# EAGLE board LEDSubMatrixHighDensity_template (EAGLE 9.6.2)
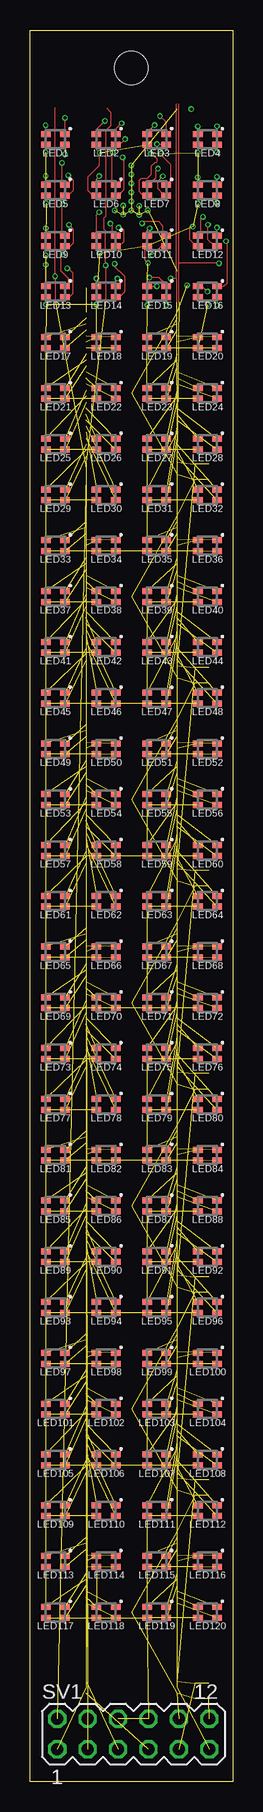
[diagram p0: board, top side]
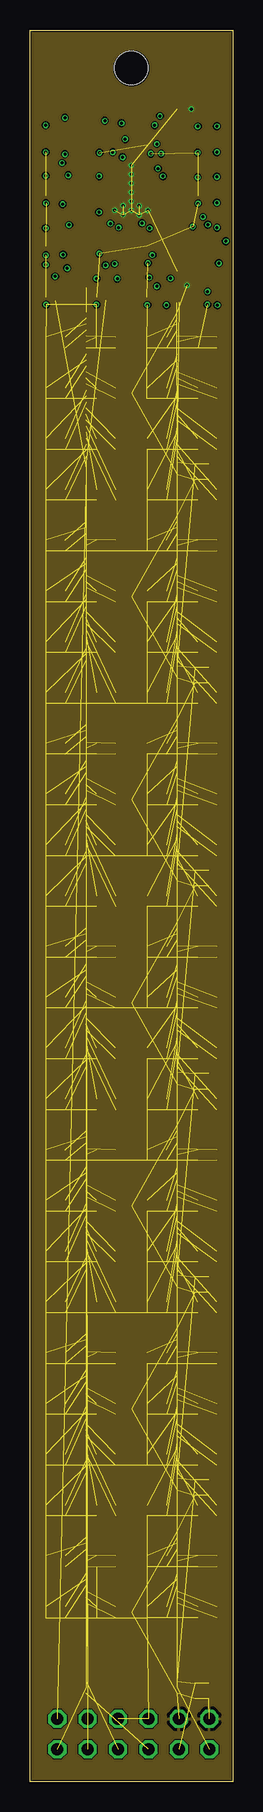
[diagram p1: board, inner layer InnerTop]
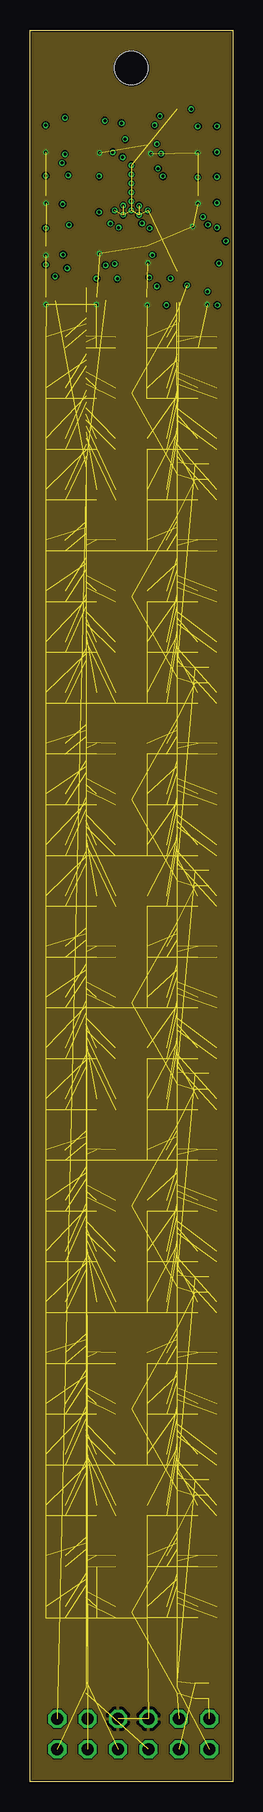
[diagram p2: board, inner layer InnerBottom]
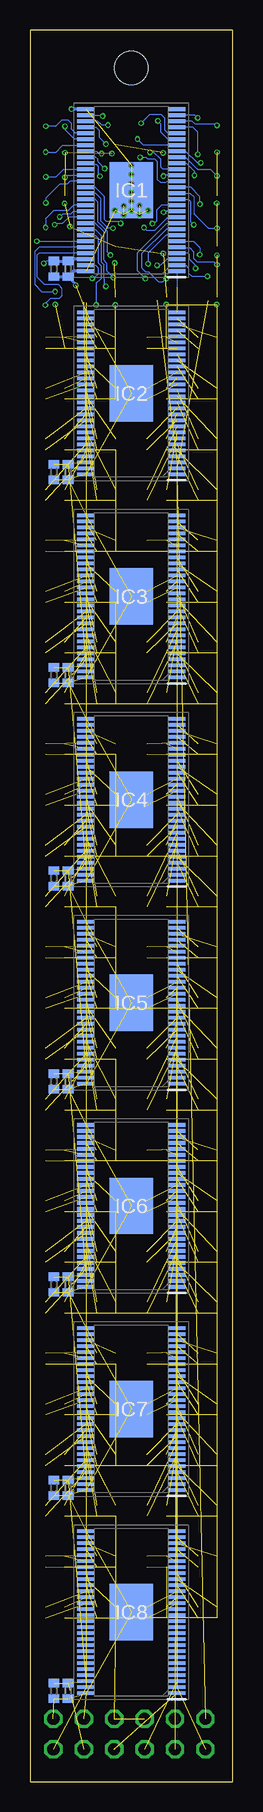
[diagram p3: board, bottom side, seen from below]

Size 16.93 x 146 mm. Coordinates in mm from the lower left corner, seen from the top.
Outline: 0,146 16.93,146 16.93,0 0,0 0,146
Copper layers (1+2*15+16): Top 0.035mm / dielectric 0.2mm / InnerTop 0.0175mm / dielectric 1.065mm / InnerBottom 0.0175mm / dielectric 0.2mm / Bottom 0.035mm
Design rules "jlcpcb_4layer_1oz *": minimum track width 4mil, minimum drill 0.2mm, track to track 4mil, track to pad 0.2mm, pad to pad 5mil, via to via 6mil, smd to smd 5mil, copper to edge 5mil, drill to drill 0.5mm, minimum pad ring 10mil, minimum via ring 0.1mm, stop-mask expansion 4mil, vias tented up to drill 0mil, thermal gap 10mil
Holes 2.75 mm at 8.47,142.82

## Footprints (pad centres in the part's own frame; a part is rotated, then mirrored left to right if it is on the bottom)
C0402 = smd 0.7 x 0.9: 1 -0.65,0; 2 0.65,0
SOP50P810X120-57N = smd 1.475 x 0.3: 1 -3.788,6.75; 2 -3.788,6.25; 3 -3.788,5.75; 4 -3.788,5.25; 5 -3.788,4.75; 6 -3.788,4.25; 7 -3.788,3.75; 8 -3.788,3.25; 9 -3.788,2.75; 10 -3.788,2.25; 11 -3.788,1.75; 12 -3.788,1.25; 13 -3.788,0.75; 14 -3.788,0.25; 15 -3.788,-0.25; 16 -3.788,-0.75; 17 -3.788,-1.25; 18 -3.788,-1.75; 19 -3.788,-2.25; 20 -3.788,-2.75; 21 -3.788,-3.25; 22 -3.788,-3.75; 23 -3.788,-4.25; 24 -3.788,-4.75; 25 -3.788,-5.25; 26 -3.788,-5.75; 27 -3.788,-6.25; 28 -3.788,-6.75; 29 3.788,-6.75; 30 3.788,-6.25; 31 3.788,-5.75; 32 3.788,-5.25; 33 3.788,-4.75; 34 3.788,-4.25; 35 3.788,-3.75; 36 3.788,-3.25; 37 3.788,-2.75; 38 3.788,-2.25; 39 3.788,-1.75; 40 3.788,-1.25; 41 3.788,-0.75; 42 3.788,-0.25; 43 3.788,0.25; 44 3.788,0.75; 45 3.788,1.25; 46 3.788,1.75; 47 3.788,2.25; 48 3.788,2.75; 49 3.788,3.25; 50 3.788,3.75; 51 3.788,4.25; 52 3.788,4.75; 53 3.788,5.25; 54 3.788,5.75; 55 3.788,6.25; 56 3.788,6.75 | smd 3.61 x 4.7: 57 0,0
B38G3RGB = smd 0.8 x 0.5: 1 0.8,0.45; 2 0.8,-0.45; 3 -0.8,-0.45; 4 -0.8,0.45
MA06-2 = drill 1.016 octagon: 1 -6.35,-1.27; 2 -6.35,1.27; 3 -3.81,-1.27; 4 -3.81,1.27; 5 -1.27,-1.27; 6 -1.27,1.27; 7 1.27,-1.27; 8 1.27,1.27; 9 3.81,-1.27; 10 3.81,1.27; 11 6.35,-1.27; 12 6.35,1.27

## Placement (x,y rotation side)
C1  .1uF  [C0402]  13.75,126.09 270 bottom
C1B  10uF  [C0402]  14.93,126.09 270 bottom
C2  .1uF  [C0402]  13.75,109.16 270 bottom
C2B  10uF  [C0402]  14.93,109.16 270 bottom
C3  .1uF  [C0402]  13.75,92.22 270 bottom
C3B  10uF  [C0402]  14.93,92.22 270 bottom
C4  .1uF  [C0402]  13.75,75.29 270 bottom
C4B  10uF  [C0402]  14.93,75.29 270 bottom
C5  .1uF  [C0402]  13.75,58.36 270 bottom
C5B  10uF  [C0402]  14.93,58.36 270 bottom
C6  .1uF  [C0402]  13.75,41.42 270 bottom
C6B  10uF  [C0402]  14.93,41.42 270 bottom
C7  .1uF  [C0402]  13.75,24.49 270 bottom
C7B  10uF  [C0402]  14.93,24.49 270 bottom
C8  .1uF  [C0402]  13.75,7.56 270 bottom
C8B  10uF  [C0402]  14.93,7.56 270 bottom
IC1  TLC5955DCAR  [SOP50P810X120-57N]  8.47,132.65 180 bottom
IC2  TLC5955DCAR  [SOP50P810X120-57N]  8.47,115.72 180 bottom
IC3  TLC5955DCAR  [SOP50P810X120-57N]  8.47,98.78 180 bottom
IC4  TLC5955DCAR  [SOP50P810X120-57N]  8.47,81.85 180 bottom
IC5  TLC5955DCAR  [SOP50P810X120-57N]  8.47,64.92 180 bottom
IC6  TLC5955DCAR  [SOP50P810X120-57N]  8.47,47.98 180 bottom
IC7  TLC5955DCAR  [SOP50P810X120-57N]  8.47,31.05 180 bottom
IC8  TLC5955DCAR  [SOP50P810X120-57N]  8.47,14.12 180 bottom
LED1  B38G3RGB  [B38G3RGB]  2.12,136.88 0 top
LED2  B38G3RGB  [B38G3RGB]  6.35,136.88 0 top
LED3  B38G3RGB  [B38G3RGB]  10.58,136.88 0 top
LED4  B38G3RGB  [B38G3RGB]  14.82,136.88 0 top
LED5  B38G3RGB  [B38G3RGB]  2.12,132.65 0 top
LED6  B38G3RGB  [B38G3RGB]  6.35,132.65 0 top
LED7  B38G3RGB  [B38G3RGB]  10.58,132.65 0 top
LED8  B38G3RGB  [B38G3RGB]  14.82,132.65 0 top
LED9  B38G3RGB  [B38G3RGB]  2.12,128.42 0 top
LED10  B38G3RGB  [B38G3RGB]  6.35,128.42 0 top
LED11  B38G3RGB  [B38G3RGB]  10.58,128.42 0 top
LED12  B38G3RGB  [B38G3RGB]  14.82,128.42 0 top
LED13  B38G3RGB  [B38G3RGB]  2.12,124.18 0 top
LED14  B38G3RGB  [B38G3RGB]  6.35,124.18 0 top
LED15  B38G3RGB  [B38G3RGB]  10.58,124.18 0 top
LED16  B38G3RGB  [B38G3RGB]  14.82,124.18 0 top
LED17  B38G3RGB  [B38G3RGB]  2.12,119.95 0 top
LED18  B38G3RGB  [B38G3RGB]  6.35,119.95 0 top
LED19  B38G3RGB  [B38G3RGB]  10.58,119.95 0 top
LED20  B38G3RGB  [B38G3RGB]  14.82,119.95 0 top
LED21  B38G3RGB  [B38G3RGB]  2.12,115.72 0 top
LED22  B38G3RGB  [B38G3RGB]  6.35,115.72 0 top
LED23  B38G3RGB  [B38G3RGB]  10.58,115.72 0 top
LED24  B38G3RGB  [B38G3RGB]  14.82,115.72 0 top
LED25  B38G3RGB  [B38G3RGB]  2.12,111.48 0 top
LED26  B38G3RGB  [B38G3RGB]  6.35,111.48 0 top
LED27  B38G3RGB  [B38G3RGB]  10.58,111.48 0 top
LED28  B38G3RGB  [B38G3RGB]  14.82,111.48 0 top
LED29  B38G3RGB  [B38G3RGB]  2.12,107.25 0 top
LED30  B38G3RGB  [B38G3RGB]  6.35,107.25 0 top
LED31  B38G3RGB  [B38G3RGB]  10.58,107.25 0 top
LED32  B38G3RGB  [B38G3RGB]  14.82,107.25 0 top
LED33  B38G3RGB  [B38G3RGB]  2.12,103.02 0 top
LED34  B38G3RGB  [B38G3RGB]  6.35,103.02 0 top
LED35  B38G3RGB  [B38G3RGB]  10.58,103.02 0 top
LED36  B38G3RGB  [B38G3RGB]  14.82,103.02 0 top
LED37  B38G3RGB  [B38G3RGB]  2.12,98.78 0 top
LED38  B38G3RGB  [B38G3RGB]  6.35,98.78 0 top
LED39  B38G3RGB  [B38G3RGB]  10.58,98.78 0 top
LED40  B38G3RGB  [B38G3RGB]  14.82,98.78 0 top
LED41  B38G3RGB  [B38G3RGB]  2.12,94.55 0 top
LED42  B38G3RGB  [B38G3RGB]  6.35,94.55 0 top
LED43  B38G3RGB  [B38G3RGB]  10.58,94.55 0 top
LED44  B38G3RGB  [B38G3RGB]  14.82,94.55 0 top
LED45  B38G3RGB  [B38G3RGB]  2.12,90.32 0 top
LED46  B38G3RGB  [B38G3RGB]  6.35,90.32 0 top
LED47  B38G3RGB  [B38G3RGB]  10.58,90.32 0 top
LED48  B38G3RGB  [B38G3RGB]  14.82,90.32 0 top
LED49  B38G3RGB  [B38G3RGB]  2.12,86.08 0 top
LED50  B38G3RGB  [B38G3RGB]  6.35,86.08 0 top
LED51  B38G3RGB  [B38G3RGB]  10.58,86.08 0 top
LED52  B38G3RGB  [B38G3RGB]  14.82,86.08 0 top
LED53  B38G3RGB  [B38G3RGB]  2.12,81.85 0 top
LED54  B38G3RGB  [B38G3RGB]  6.35,81.85 0 top
LED55  B38G3RGB  [B38G3RGB]  10.58,81.85 0 top
LED56  B38G3RGB  [B38G3RGB]  14.82,81.85 0 top
LED57  B38G3RGB  [B38G3RGB]  2.12,77.62 0 top
LED58  B38G3RGB  [B38G3RGB]  6.35,77.62 0 top
LED59  B38G3RGB  [B38G3RGB]  10.58,77.62 0 top
LED60  B38G3RGB  [B38G3RGB]  14.82,77.62 0 top
LED61  B38G3RGB  [B38G3RGB]  2.12,73.38 0 top
LED62  B38G3RGB  [B38G3RGB]  6.35,73.38 0 top
LED63  B38G3RGB  [B38G3RGB]  10.58,73.38 0 top
LED64  B38G3RGB  [B38G3RGB]  14.82,73.38 0 top
LED65  B38G3RGB  [B38G3RGB]  2.12,69.15 0 top
LED66  B38G3RGB  [B38G3RGB]  6.35,69.15 0 top
LED67  B38G3RGB  [B38G3RGB]  10.58,69.15 0 top
LED68  B38G3RGB  [B38G3RGB]  14.82,69.15 0 top
LED69  B38G3RGB  [B38G3RGB]  2.12,64.92 0 top
LED70  B38G3RGB  [B38G3RGB]  6.35,64.92 0 top
LED71  B38G3RGB  [B38G3RGB]  10.58,64.92 0 top
LED72  B38G3RGB  [B38G3RGB]  14.82,64.92 0 top
LED73  B38G3RGB  [B38G3RGB]  2.12,60.68 0 top
LED74  B38G3RGB  [B38G3RGB]  6.35,60.68 0 top
LED75  B38G3RGB  [B38G3RGB]  10.58,60.68 0 top
LED76  B38G3RGB  [B38G3RGB]  14.82,60.68 0 top
LED77  B38G3RGB  [B38G3RGB]  2.12,56.45 0 top
LED78  B38G3RGB  [B38G3RGB]  6.35,56.45 0 top
LED79  B38G3RGB  [B38G3RGB]  10.58,56.45 0 top
LED80  B38G3RGB  [B38G3RGB]  14.82,56.45 0 top
LED81  B38G3RGB  [B38G3RGB]  2.12,52.22 0 top
LED82  B38G3RGB  [B38G3RGB]  6.35,52.22 0 top
LED83  B38G3RGB  [B38G3RGB]  10.58,52.22 0 top
LED84  B38G3RGB  [B38G3RGB]  14.82,52.22 0 top
LED85  B38G3RGB  [B38G3RGB]  2.12,47.98 0 top
LED86  B38G3RGB  [B38G3RGB]  6.35,47.98 0 top
LED87  B38G3RGB  [B38G3RGB]  10.58,47.98 0 top
LED88  B38G3RGB  [B38G3RGB]  14.82,47.98 0 top
LED89  B38G3RGB  [B38G3RGB]  2.12,43.75 0 top
LED90  B38G3RGB  [B38G3RGB]  6.35,43.75 0 top
LED91  B38G3RGB  [B38G3RGB]  10.58,43.75 0 top
LED92  B38G3RGB  [B38G3RGB]  14.82,43.75 0 top
LED93  B38G3RGB  [B38G3RGB]  2.12,39.52 0 top
LED94  B38G3RGB  [B38G3RGB]  6.35,39.52 0 top
LED95  B38G3RGB  [B38G3RGB]  10.58,39.52 0 top
LED96  B38G3RGB  [B38G3RGB]  14.82,39.52 0 top
LED97  B38G3RGB  [B38G3RGB]  2.12,35.28 0 top
LED98  B38G3RGB  [B38G3RGB]  6.35,35.28 0 top
LED99  B38G3RGB  [B38G3RGB]  10.58,35.28 0 top
LED100  B38G3RGB  [B38G3RGB]  14.82,35.28 0 top
LED101  B38G3RGB  [B38G3RGB]  2.12,31.05 0 top
LED102  B38G3RGB  [B38G3RGB]  6.35,31.05 0 top
LED103  B38G3RGB  [B38G3RGB]  10.58,31.05 0 top
LED104  B38G3RGB  [B38G3RGB]  14.82,31.05 0 top
LED105  B38G3RGB  [B38G3RGB]  2.12,26.82 0 top
LED106  B38G3RGB  [B38G3RGB]  6.35,26.82 0 top
LED107  B38G3RGB  [B38G3RGB]  10.58,26.82 0 top
LED108  B38G3RGB  [B38G3RGB]  14.82,26.82 0 top
LED109  B38G3RGB  [B38G3RGB]  2.12,22.58 0 top
LED110  B38G3RGB  [B38G3RGB]  6.35,22.58 0 top
LED111  B38G3RGB  [B38G3RGB]  10.58,22.58 0 top
LED112  B38G3RGB  [B38G3RGB]  14.82,22.58 0 top
LED113  B38G3RGB  [B38G3RGB]  2.12,18.35 0 top
LED114  B38G3RGB  [B38G3RGB]  6.35,18.35 0 top
LED115  B38G3RGB  [B38G3RGB]  10.58,18.35 0 top
LED116  B38G3RGB  [B38G3RGB]  14.82,18.35 0 top
LED117  B38G3RGB  [B38G3RGB]  2.12,14.12 0 top
LED118  B38G3RGB  [B38G3RGB]  6.35,14.12 0 top
LED119  B38G3RGB  [B38G3RGB]  10.58,14.12 0 top
LED120  B38G3RGB  [B38G3RGB]  14.82,14.12 0 top
SV1  [MA06-2]  8.63,3.95 0 top

## Library data of the parts
C1 C1B C2 C2B C3 C3B C4 C4B C5 C5B C6 C6B C7 C7B C8 C8B = rcl; SPICEPREFIX: C
IC1-IC8 = TLC5955DCAR; ARROW_PART_NUMBER: TLC5955DCAR; ARROW_PRICE-STOCK: https://www.arrow.com/en/products/tlc5955dcar/texas-instruments; DESCRIPTION: 48ch, 16bit PWM LED Driver with Dot-Correction, Brightness Control, Open/Short Detection; HEIGHT: 1.2mm; MANUFACTURER_NAME: Texas Instruments; MANUFACTURER_PART_NUMBER: TLC5955DCAR; MOUSER_PART_NUMBER: 595-TLC5955DCAR; MOUSER_PRICE-STOCK: https://www.mouser.co.uk/ProductDetail/Texas-Instruments/TLC5955DCAR?qs=%2Fd%252BFzHvH4c3zo%2FeGYG5n7g%3D%3D
LED1-LED120 = B38G3RGB; ARROW_PART_NUMBER: SML-LX0606IGC-TR; ARROW_PRICE-STOCK: https://www.arrow.com/en/products/sml-lx0606igc-tr/lumex; DESCRIPTION: Standard LEDs - SMD Surface Mount LEDs; HEIGHT: 0.7mm; MANUFACTURER_NAME: Lumex; MANUFACTURER_PART_NUMBER: SML-LX0606IGC-TR; MOUSER_PART_NUMBER: 696-SML-0606IGCTR; MOUSER_PRICE-STOCK: https://www.mouser.co.uk/ProductDetail/Lumex/SML-LX0606IGC-TR?qs=I1ILoAvtKy%252BVd7WFwiUkZQ%3D%3D
SV1 = VoxelEagleLib; OC_FARNELL: unknown; OC_NEWARK: unknown

## Nets
3V3: LED1.3 LED2.3 LED3.3 LED4.3 LED5.3 LED6.3 LED7.3 LED8.3 LED9.3 LED10.3 LED11.3 LED12.3 LED13.3 LED14.3 LED15.3 LED16.3 LED17.3 LED18.3 LED19.3 LED20.3 LED21.3 LED22.3 LED23.3 LED24.3 LED25.3 LED26.3 LED27.3 LED28.3 LED29.3 LED30.3 LED31.3 LED32.3 LED33.3 LED34.3 LED35.3 LED36.3 LED37.3 LED38.3 LED39.3 LED40.3 LED41.3 LED42.3 LED43.3 LED44.3 LED45.3 LED46.3 LED47.3 LED48.3 LED49.3 LED50.3 LED51.3 LED52.3 LED53.3 LED54.3 LED55.3 LED56.3 LED57.3 LED58.3 LED59.3 LED60.3 LED61.3 LED62.3 LED63.3 LED64.3 LED65.3 LED66.3 LED67.3 LED68.3 LED69.3 LED70.3 LED71.3 LED72.3 LED73.3 LED74.3 LED75.3 LED76.3 LED77.3 LED78.3 LED79.3 LED80.3 LED81.3 LED82.3 LED83.3 LED84.3 LED85.3 LED86.3 LED87.3 LED88.3 LED89.3 LED90.3 LED91.3 LED92.3 LED93.3 LED94.3 LED95.3 LED96.3 LED97.3 LED98.3 LED99.3 LED100.3 LED101.3 LED102.3 LED103.3 LED104.3 LED105.3 LED106.3 LED107.3 LED108.3 LED109.3 LED110.3 LED111.3 LED112.3 LED113.3 LED114.3 LED115.3 LED116.3 LED117.3 LED118.3 LED119.3 LED120.3 SV1.6 SV1.8
3V3_LOGIC: C1.1 C1B.1 C2.1 C2B.1 C3.1 C3B.1 C4.1 C4B.1 C5.1 C5B.1 C6.1 C6B.1 C7.1 C7B.1 C8.1 C8B.1 IC1.54 IC2.54 IC3.54 IC4.54 IC5.54 IC6.54 IC7.54 IC8.54 SV1.9
GND: C1.2 C1B.2 C2.2 C2B.2 C3.2 C3B.2 C4.2 C4B.2 C5.2 C5B.2 C6.2 C6B.2 C7.2 C7B.2 C8.2 C8B.2 IC1.29 IC1.56 IC1.57 IC2.29 IC2.56 IC2.57 IC3.29 IC3.56 IC3.57 IC4.29 IC4.56 IC4.57 IC5.29 IC5.56 IC5.57 IC6.29 IC6.56 IC6.57 IC7.29 IC7.56 IC7.57 IC8.29 IC8.56 IC8.57 SV1.10 SV1.12
GSCLK: IC1.55 IC2.55 IC3.55 IC4.55 IC5.55 IC6.55 IC7.55 IC8.55 SV1.11
LAT: IC1.3 IC2.3 IC3.3 IC4.3 IC5.3 IC6.3 IC7.3 IC8.3 SV1.5
N$352: IC8.53
N$353: IC8.52
N$354: IC8.51
N$355: IC8.50
N$356: IC8.49
N$357: IC8.48
N$358: IC8.47
N$359: IC8.46
N$360: IC8.45
N$361: IC8.44
N$362: IC8.43
N$363: IC8.42
N$IC8_PIN4: IC8.4
N$IC8_PIN5: IC8.5
N$IC8_PIN6: IC8.6
N$IC8_PIN7: IC8.7
N$IC8_PIN8: IC8.8
N$IC8_PIN9: IC8.9
N$IC8_PIN10: IC8.10
N$IC8_PIN11: IC8.11
N$IC8_PIN12: IC8.12
N$IC8_PIN13: IC8.13
N$IC8_PIN14: IC8.14
N$IC8_PIN15: IC8.15
N$LEDB1: IC1.25 LED1.2
N$LEDB2: IC1.22 LED2.2
N$LEDB3: IC1.32 LED3.2
N$LEDB4: IC1.35 LED4.2
N$LEDB5: IC1.19 LED5.2
N$LEDB6: IC1.16 LED6.2
N$LEDB7: IC1.38 LED7.2
N$LEDB8: IC1.41 LED8.2
N$LEDB9: IC1.13 LED9.2
N$LEDB10: IC1.10 LED10.2
N$LEDB11: IC1.44 LED11.2
N$LEDB12: IC1.47 LED12.2
N$LEDB13: IC1.4 LED13.2
N$LEDB14: IC1.7 LED14.2
N$LEDB15: IC1.50 LED15.2
N$LEDB16: IC1.53 LED16.2
N$LEDB17: IC2.25 LED17.2
N$LEDB18: IC2.22 LED18.2
N$LEDB19: IC2.32 LED19.2
N$LEDB20: IC2.35 LED20.2
N$LEDB21: IC2.19 LED21.2
N$LEDB22: IC2.16 LED22.2
N$LEDB23: IC2.38 LED23.2
N$LEDB24: IC2.41 LED24.2
N$LEDB25: IC2.13 LED25.2
N$LEDB26: IC2.10 LED26.2
N$LEDB27: IC2.44 LED27.2
N$LEDB28: IC2.47 LED28.2
N$LEDB29: IC2.4 LED29.2
N$LEDB30: IC2.7 LED30.2
N$LEDB31: IC2.50 LED31.2
N$LEDB32: IC2.53 LED32.2
N$LEDB33: IC3.25 LED33.2
N$LEDB34: IC3.22 LED34.2
N$LEDB35: IC3.32 LED35.2
N$LEDB36: IC3.35 LED36.2
N$LEDB37: IC3.19 LED37.2
N$LEDB38: IC3.16 LED38.2
N$LEDB39: IC3.38 LED39.2
N$LEDB40: IC3.41 LED40.2
N$LEDB41: IC3.13 LED41.2
N$LEDB42: IC3.10 LED42.2
N$LEDB43: IC3.44 LED43.2
N$LEDB44: IC3.47 LED44.2
N$LEDB45: IC3.4 LED45.2
N$LEDB46: IC3.7 LED46.2
N$LEDB47: IC3.50 LED47.2
N$LEDB48: IC3.53 LED48.2
N$LEDB49: IC4.25 LED49.2
N$LEDB50: IC4.22 LED50.2
N$LEDB51: IC4.32 LED51.2
N$LEDB52: IC4.35 LED52.2
N$LEDB53: IC4.19 LED53.2
N$LEDB54: IC4.16 LED54.2
N$LEDB55: IC4.38 LED55.2
N$LEDB56: IC4.41 LED56.2
N$LEDB57: IC4.13 LED57.2
N$LEDB58: IC4.10 LED58.2
N$LEDB59: IC4.44 LED59.2
N$LEDB60: IC4.47 LED60.2
N$LEDB61: IC4.4 LED61.2
N$LEDB62: IC4.7 LED62.2
N$LEDB63: IC4.50 LED63.2
N$LEDB64: IC4.53 LED64.2
N$LEDB65: IC5.25 LED65.2
N$LEDB66: IC5.22 LED66.2
N$LEDB67: IC5.32 LED67.2
N$LEDB68: IC5.35 LED68.2
N$LEDB69: IC5.19 LED69.2
N$LEDB70: IC5.16 LED70.2
N$LEDB71: IC5.38 LED71.2
N$LEDB72: IC5.41 LED72.2
N$LEDB73: IC5.13 LED73.2
N$LEDB74: IC5.10 LED74.2
N$LEDB75: IC5.44 LED75.2
N$LEDB76: IC5.47 LED76.2
N$LEDB77: IC5.4 LED77.2
N$LEDB78: IC5.7 LED78.2
N$LEDB79: IC5.50 LED79.2
N$LEDB80: IC5.53 LED80.2
N$LEDB81: IC6.25 LED81.2
N$LEDB82: IC6.22 LED82.2
N$LEDB83: IC6.32 LED83.2
N$LEDB84: IC6.35 LED84.2
N$LEDB85: IC6.19 LED85.2
N$LEDB86: IC6.16 LED86.2
N$LEDB87: IC6.38 LED87.2
N$LEDB88: IC6.41 LED88.2
N$LEDB89: IC6.13 LED89.2
N$LEDB90: IC6.10 LED90.2
N$LEDB91: IC6.44 LED91.2
N$LEDB92: IC6.47 LED92.2
N$LEDB93: IC6.4 LED93.2
N$LEDB94: IC6.7 LED94.2
N$LEDB95: IC6.50 LED95.2
N$LEDB96: IC6.53 LED96.2
N$LEDB97: IC7.25 LED97.2
N$LEDB98: IC7.22 LED98.2
N$LEDB99: IC7.32 LED99.2
N$LEDB100: IC7.35 LED100.2
N$LEDB101: IC7.19 LED101.2
N$LEDB102: IC7.16 LED102.2
N$LEDB103: IC7.38 LED103.2
N$LEDB104: IC7.41 LED104.2
N$LEDB105: IC7.13 LED105.2
N$LEDB106: IC7.10 LED106.2
N$LEDB107: IC7.44 LED107.2
N$LEDB108: IC7.47 LED108.2
N$LEDB109: IC7.4 LED109.2
N$LEDB110: IC7.7 LED110.2
N$LEDB111: IC7.50 LED111.2
N$LEDB112: IC7.53 LED112.2
N$LEDB113: IC8.25 LED113.2
N$LEDB114: IC8.22 LED114.2
N$LEDB115: IC8.32 LED115.2
N$LEDB116: IC8.35 LED116.2
N$LEDB117: IC8.19 LED117.2
N$LEDB118: IC8.16 LED118.2
N$LEDB119: IC8.38 LED119.2
N$LEDB120: IC8.41 LED120.2
N$LEDG1: IC1.27 LED1.1
N$LEDG2: IC1.24 LED2.1
N$LEDG3: IC1.30 LED3.1
N$LEDG4: IC1.33 LED4.1
N$LEDG5: IC1.21 LED5.1
N$LEDG6: IC1.18 LED6.1
N$LEDG7: IC1.36 LED7.1
N$LEDG8: IC1.39 LED8.1
N$LEDG9: IC1.15 LED9.1
N$LEDG10: IC1.12 LED10.1
N$LEDG11: IC1.42 LED11.1
N$LEDG12: IC1.45 LED12.1
N$LEDG13: IC1.6 LED13.1
N$LEDG14: IC1.9 LED14.1
N$LEDG15: IC1.48 LED15.1
N$LEDG16: IC1.51 LED16.1
N$LEDG17: IC2.27 LED17.1
N$LEDG18: IC2.24 LED18.1
N$LEDG19: IC2.30 LED19.1
N$LEDG20: IC2.33 LED20.1
N$LEDG21: IC2.21 LED21.1
N$LEDG22: IC2.18 LED22.1
N$LEDG23: IC2.36 LED23.1
N$LEDG24: IC2.39 LED24.1
N$LEDG25: IC2.15 LED25.1
N$LEDG26: IC2.12 LED26.1
N$LEDG27: IC2.42 LED27.1
N$LEDG28: IC2.45 LED28.1
N$LEDG29: IC2.6 LED29.1
N$LEDG30: IC2.9 LED30.1
N$LEDG31: IC2.48 LED31.1
N$LEDG32: IC2.51 LED32.1
N$LEDG33: IC3.27 LED33.1
N$LEDG34: IC3.24 LED34.1
N$LEDG35: IC3.30 LED35.1
N$LEDG36: IC3.33 LED36.1
N$LEDG37: IC3.21 LED37.1
N$LEDG38: IC3.18 LED38.1
N$LEDG39: IC3.36 LED39.1
N$LEDG40: IC3.39 LED40.1
N$LEDG41: IC3.15 LED41.1
N$LEDG42: IC3.12 LED42.1
N$LEDG43: IC3.42 LED43.1
N$LEDG44: IC3.45 LED44.1
N$LEDG45: IC3.6 LED45.1
N$LEDG46: IC3.9 LED46.1
N$LEDG47: IC3.48 LED47.1
N$LEDG48: IC3.51 LED48.1
N$LEDG49: IC4.27 LED49.1
N$LEDG50: IC4.24 LED50.1
N$LEDG51: IC4.30 LED51.1
N$LEDG52: IC4.33 LED52.1
N$LEDG53: IC4.21 LED53.1
N$LEDG54: IC4.18 LED54.1
N$LEDG55: IC4.36 LED55.1
N$LEDG56: IC4.39 LED56.1
N$LEDG57: IC4.15 LED57.1
N$LEDG58: IC4.12 LED58.1
N$LEDG59: IC4.42 LED59.1
N$LEDG60: IC4.45 LED60.1
N$LEDG61: IC4.6 LED61.1
N$LEDG62: IC4.9 LED62.1
N$LEDG63: IC4.48 LED63.1
N$LEDG64: IC4.51 LED64.1
N$LEDG65: IC5.27 LED65.1
N$LEDG66: IC5.24 LED66.1
N$LEDG67: IC5.30 LED67.1
N$LEDG68: IC5.33 LED68.1
N$LEDG69: IC5.21 LED69.1
N$LEDG70: IC5.18 LED70.1
N$LEDG71: IC5.36 LED71.1
N$LEDG72: IC5.39 LED72.1
N$LEDG73: IC5.15 LED73.1
N$LEDG74: IC5.12 LED74.1
N$LEDG75: IC5.42 LED75.1
N$LEDG76: IC5.45 LED76.1
N$LEDG77: IC5.6 LED77.1
N$LEDG78: IC5.9 LED78.1
N$LEDG79: IC5.48 LED79.1
N$LEDG80: IC5.51 LED80.1
N$LEDG81: IC6.27 LED81.1
N$LEDG82: IC6.24 LED82.1
N$LEDG83: IC6.30 LED83.1
N$LEDG84: IC6.33 LED84.1
N$LEDG85: IC6.21 LED85.1
N$LEDG86: IC6.18 LED86.1
N$LEDG87: IC6.36 LED87.1
N$LEDG88: IC6.39 LED88.1
N$LEDG89: IC6.15 LED89.1
N$LEDG90: IC6.12 LED90.1
N$LEDG91: IC6.42 LED91.1
N$LEDG92: IC6.45 LED92.1
N$LEDG93: IC6.6 LED93.1
N$LEDG94: IC6.9 LED94.1
N$LEDG95: IC6.48 LED95.1
N$LEDG96: IC6.51 LED96.1
N$LEDG97: IC7.27 LED97.1
N$LEDG98: IC7.24 LED98.1
N$LEDG99: IC7.30 LED99.1
N$LEDG100: IC7.33 LED100.1
N$LEDG101: IC7.21 LED101.1
N$LEDG102: IC7.18 LED102.1
N$LEDG103: IC7.36 LED103.1
N$LEDG104: IC7.39 LED104.1
N$LEDG105: IC7.15 LED105.1
N$LEDG106: IC7.12 LED106.1
N$LEDG107: IC7.42 LED107.1
N$LEDG108: IC7.45 LED108.1
N$LEDG109: IC7.6 LED109.1
N$LEDG110: IC7.9 LED110.1
N$LEDG111: IC7.48 LED111.1
N$LEDG112: IC7.51 LED112.1
N$LEDG113: IC8.27 LED113.1
N$LEDG114: IC8.24 LED114.1
N$LEDG115: IC8.30 LED115.1
N$LEDG116: IC8.33 LED116.1
N$LEDG117: IC8.21 LED117.1
N$LEDG118: IC8.18 LED118.1
N$LEDG119: IC8.36 LED119.1
N$LEDG120: IC8.39 LED120.1
N$LEDR1: IC1.26 LED1.4
N$LEDR2: IC1.23 LED2.4
N$LEDR3: IC1.31 LED3.4
N$LEDR4: IC1.34 LED4.4
N$LEDR5: IC1.20 LED5.4
N$LEDR6: IC1.17 LED6.4
N$LEDR7: IC1.37 LED7.4
N$LEDR8: IC1.40 LED8.4
N$LEDR9: IC1.14 LED9.4
N$LEDR10: IC1.11 LED10.4
N$LEDR11: IC1.43 LED11.4
N$LEDR12: IC1.46 LED12.4
N$LEDR13: IC1.5 LED13.4
N$LEDR14: IC1.8 LED14.4
N$LEDR15: IC1.49 LED15.4
N$LEDR16: IC1.52 LED16.4
N$LEDR17: IC2.26 LED17.4
N$LEDR18: IC2.23 LED18.4
N$LEDR19: IC2.31 LED19.4
N$LEDR20: IC2.34 LED20.4
N$LEDR21: IC2.20 LED21.4
N$LEDR22: IC2.17 LED22.4
N$LEDR23: IC2.37 LED23.4
N$LEDR24: IC2.40 LED24.4
N$LEDR25: IC2.14 LED25.4
N$LEDR26: IC2.11 LED26.4
N$LEDR27: IC2.43 LED27.4
N$LEDR28: IC2.46 LED28.4
N$LEDR29: IC2.5 LED29.4
N$LEDR30: IC2.8 LED30.4
N$LEDR31: IC2.49 LED31.4
N$LEDR32: IC2.52 LED32.4
N$LEDR33: IC3.26 LED33.4
N$LEDR34: IC3.23 LED34.4
N$LEDR35: IC3.31 LED35.4
N$LEDR36: IC3.34 LED36.4
N$LEDR37: IC3.20 LED37.4
N$LEDR38: IC3.17 LED38.4
N$LEDR39: IC3.37 LED39.4
N$LEDR40: IC3.40 LED40.4
N$LEDR41: IC3.14 LED41.4
N$LEDR42: IC3.11 LED42.4
N$LEDR43: IC3.43 LED43.4
N$LEDR44: IC3.46 LED44.4
N$LEDR45: IC3.5 LED45.4
N$LEDR46: IC3.8 LED46.4
N$LEDR47: IC3.49 LED47.4
N$LEDR48: IC3.52 LED48.4
N$LEDR49: IC4.26 LED49.4
N$LEDR50: IC4.23 LED50.4
N$LEDR51: IC4.31 LED51.4
N$LEDR52: IC4.34 LED52.4
N$LEDR53: IC4.20 LED53.4
N$LEDR54: IC4.17 LED54.4
N$LEDR55: IC4.37 LED55.4
N$LEDR56: IC4.40 LED56.4
N$LEDR57: IC4.14 LED57.4
N$LEDR58: IC4.11 LED58.4
N$LEDR59: IC4.43 LED59.4
N$LEDR60: IC4.46 LED60.4
N$LEDR61: IC4.5 LED61.4
N$LEDR62: IC4.8 LED62.4
N$LEDR63: IC4.49 LED63.4
N$LEDR64: IC4.52 LED64.4
N$LEDR65: IC5.26 LED65.4
N$LEDR66: IC5.23 LED66.4
N$LEDR67: IC5.31 LED67.4
N$LEDR68: IC5.34 LED68.4
N$LEDR69: IC5.20 LED69.4
N$LEDR70: IC5.17 LED70.4
N$LEDR71: IC5.37 LED71.4
N$LEDR72: IC5.40 LED72.4
N$LEDR73: IC5.14 LED73.4
N$LEDR74: IC5.11 LED74.4
N$LEDR75: IC5.43 LED75.4
N$LEDR76: IC5.46 LED76.4
N$LEDR77: IC5.5 LED77.4
N$LEDR78: IC5.8 LED78.4
N$LEDR79: IC5.49 LED79.4
N$LEDR80: IC5.52 LED80.4
N$LEDR81: IC6.26 LED81.4
N$LEDR82: IC6.23 LED82.4
N$LEDR83: IC6.31 LED83.4
N$LEDR84: IC6.34 LED84.4
N$LEDR85: IC6.20 LED85.4
N$LEDR86: IC6.17 LED86.4
N$LEDR87: IC6.37 LED87.4
N$LEDR88: IC6.40 LED88.4
N$LEDR89: IC6.14 LED89.4
N$LEDR90: IC6.11 LED90.4
N$LEDR91: IC6.43 LED91.4
N$LEDR92: IC6.46 LED92.4
N$LEDR93: IC6.5 LED93.4
N$LEDR94: IC6.8 LED94.4
N$LEDR95: IC6.49 LED95.4
N$LEDR96: IC6.52 LED96.4
N$LEDR97: IC7.26 LED97.4
N$LEDR98: IC7.23 LED98.4
N$LEDR99: IC7.31 LED99.4
N$LEDR100: IC7.34 LED100.4
N$LEDR101: IC7.20 LED101.4
N$LEDR102: IC7.17 LED102.4
N$LEDR103: IC7.37 LED103.4
N$LEDR104: IC7.40 LED104.4
N$LEDR105: IC7.14 LED105.4
N$LEDR106: IC7.11 LED106.4
N$LEDR107: IC7.43 LED107.4
N$LEDR108: IC7.46 LED108.4
N$LEDR109: IC7.5 LED109.4
N$LEDR110: IC7.8 LED110.4
N$LEDR111: IC7.49 LED111.4
N$LEDR112: IC7.52 LED112.4
N$LEDR113: IC8.26 LED113.4
N$LEDR114: IC8.23 LED114.4
N$LEDR115: IC8.31 LED115.4
N$LEDR116: IC8.34 LED116.4
N$LEDR117: IC8.20 LED117.4
N$LEDR118: IC8.17 LED118.4
N$LEDR119: IC8.37 LED119.4
N$LEDR120: IC8.40 LED120.4
SCLK: IC1.2 IC2.2 IC3.2 IC4.2 IC5.2 IC6.2 IC7.2 IC8.2 SV1.1
SIN_1,2: IC2.1 SV1.2
SIN_3,4: IC4.1 SV1.3
SIN_5,6: IC6.1 SV1.4
SIN_7,8: IC8.1 SV1.7
SOUT1: IC1.28
SOUT2: IC1.1 IC2.28
SOUT3: IC3.28
SOUT4: IC3.1 IC4.28
SOUT5: IC5.28
SOUT6: IC5.1 IC6.28
SOUT7: IC7.28
SOUT8: IC7.1 IC8.28

## Tracks (layer width: path | path; a pad name or v marks a point on that pad's centre or on a via)
3V3  (via drill 0.25)  (119 unrouted)
  Top 0.102: LED1.3 v1.32,135.81 | LED2.3 5.55,136.03 v5.82,135.76 5.82,134.73 4.87,133.78 4.87,132.6 5.27,132.2 LED6.3 | LED3.3 9.78,136 v10.09,135.7 10.18,135.7 10.65,135.23 10.65,135.04 10.6,134.99 10.47,134.99 10.16,134.68 10.16,133.98 9.83,133.65 9.31,133.65 9.13,133.47 9.13,132.52 9.45,132.2 LED7.3 | LED5.3 1.34,132.18 v1.34,131.56 | LED9.3 1.32,127.24 v1.33,127.22 | LED10.3 5.55,127.61 v5.79,127.36 | v9.85,126.57 9.57,126.85 9.57,127.75 LED11.3 | LED15.3 9.78,123.1 v9.8,123.08 | LED14.3 v5.55,123.12 | LED13.3 1.32,123.14 v1.34,123.12 | v14.81,123.11 14.19,123.73 LED16.3 | LED8.3 14.02,131.56 v14.04,131.54 | LED4.3 14,136.42 v14,135.77 | LED12.3 13.91,127.97 13.37,128.51 13.37,129.43 13.54,129.61 v13.59,129.61
  pour InnerBottom: -17,163 34,163 34,-24 17,-24 -17,-24
3V3_LOGIC  (via drill 0.25)  (22 unrouted)
  Top 0.102: 12.45,123.32 12.45,126.56 | 12.45,126.56 12.45,139.85 | v15.78,126.56 12.45,126.56
  Bottom 0.102: C1B.1 15.6,126.74 v15.78,126.56
  Bottom 0.254: IC1.54 13.59,126.9 C1.1 C1B.1
GND  (via drill 0.25)  (51 unrouted)
  Bottom 0.254: v13.46,139.41 v13.45,139.4 IC1.29 | C1B.2 C1.2 | IC1.56 13.29,125.9 C1.2 | C1.2 13.11,124.8 v13.11,124.72
  other vias: 8.46,134.72 8.46,133.97 8.46,133.22 8.46,132.47 8.46,131.72 8.46,130.97 9.12,131.35 7.79,131.36 7.79,130.61 9.12,130.6 7.07,130.96 9.83,130.96
  pour InnerTop: -16,162 32,162 32,82 32,-14 -16,-14
GSCLK  (via drill 0.25)  (8 unrouted)
  Top 0.102: 12.23,125.29 v11.75,125.29 v11.74,125.29 | 12.23,125.29 12.23,123.27 | 12.23,125.29 12.23,139.86
  Bottom 0.102: IC1.55 11.47,126.4 11.24,126.17 11.24,125.66 11.61,125.29 v11.74,125.29
LAT  (via drill 0.25)  (8 unrouted)
  Top 0.102: 6.42,139.47 6.79,139.11 6.79,138.08 6.34,137.64 6.34,130.5 6.19,130.34 6.19,129.4 6.32,129.26 6.32,127.15 6.32,127.14 v6.32,126.38 6.32,123.47
  Bottom 0.102: IC1.3 5.51,126.9 6.03,126.38 v6.32,126.38
N$LEDB1  (via drill 0.25)
  Top 0.102: LED1.2 v2.92,135.64
  Bottom 0.102: v2.92,135.64 2.92,137.5 3.32,137.9 IC1.25
N$LEDB2  (via drill 0.25)
  Top 0.102: v7.96,136.91 7.49,136.43 LED2.2
  Bottom 0.102: IC1.22 7.45,136.4 v7.96,136.91
N$LEDB3  (via drill 0.25)
  Top 0.102: LED3.2 10.65,136.43 v10.59,136.5
  Bottom 0.102: IC1.32 11.42,137.9 11.15,137.63 11.15,137.06 v10.59,136.5
N$LEDB4  (via drill 0.25)
  Top 0.102: LED4.2 v15.62,135.82
  Bottom 0.102: v15.62,135.82 14.77,135.82 14.18,136.4 IC1.35
N$LEDB5  (via drill 0.25)
  Top 0.102: v3.21,133.89 3.6,133.5 3.6,132.62 3.18,132.2 LED5.2
  Bottom 0.102: IC1.19 3.89,134.9 3.21,134.22 v3.21,133.89
N$LEDB6  (via drill 0.25)
  Top 0.102: v7.74,135.39 7.82,135.3 7.82,132.63 7.39,132.2 LED6.2
  Bottom 0.102: v7.74,135.39 7.24,135.39 7.13,135.28 6.53,135.28 6.33,135.08 6.33,133.57 6.04,133.29 5.57,133.29 5.46,133.4 IC1.16
N$LEDB7  (via drill 0.25)
  Top 0.102: LED7.2 11.23,132.2 10.63,132.8 10.63,133.35 v11.09,133.81
  Bottom 0.102: IC1.38 12.15,134.8 11.41,134.8 11.26,134.64 11.26,133.98 v11.09,133.81
N$LEDB8  (via drill 0.25)
  Top 0.102: LED8.2 v15.62,131.6 v15.61,131.6
  Bottom 0.102: IC1.41 13.57,133.4 13.82,133.15 14.46,133.15 15.61,132 v15.61,131.6
N$LEDB9  (via drill 0.25)
  Top 0.102: v3.26,129.76 3.62,129.4 3.62,128.22 3.36,127.97 LED9.2
  Bottom 0.102: IC1.13 3.69,131.9 3.52,131.73 3.52,130.01 v3.26,129.76
N$LEDB10  (via drill 0.25)
  Top 0.102: v7.42,129.54 7.63,129.54 7.8,129.37 7.8,128.31 7.45,127.97 LED10.2
  Bottom 0.102: IC1.10 5.43,130.4 6.51,129.31 7.18,129.31 v7.42,129.54
N$LEDB11  (via drill 0.25)
  Top 0.102: LED11.2 10.99,127.97 10.27,127.25 v10.22,127.25
  Bottom 0.102: v10.22,127.25 10.52,127.54 10.52,129.25 11.26,129.99 11.26,131.64 11.51,131.9 IC1.44
N$LEDB12  (via drill 0.25)
  Top 0.102: LED12.2 15.43,127.97 14.87,128.53 v14.87,129.78
  Bottom 0.102: IC1.47 13.68,130.4 14.2,129.88 14.76,129.88 v14.87,129.78
N$LEDB13  (via drill 0.25)
  Top 0.102: v3.11,126.14 3.19,126.14 3.57,125.76 3.57,124.03 3.28,123.73 LED13.2
  Bottom 0.102: v3.11,126.14 3.11,126.39 3.64,126.91 3.64,127.28 3.75,127.4 IC1.4
N$LEDB14  (via drill 0.25)
  Top 0.102: v7.08,126.5 7.08,126.27 7.88,125.46 7.88,124.14 7.47,123.73 LED14.2
  Bottom 0.102: IC1.7 5.56,128.9 7.08,127.39 v7.08,126.5
N$LEDB15  (via drill 0.25)
  Top 0.102: LED15.2 v11.38,123.09 v11.39,123.08
  Bottom 0.102: v11.39,123.08 11.39,124.88 10.99,125.28 10.99,126.35 11.25,126.6 11.25,128.65 11.5,128.9 IC1.50
N$LEDB16  (via drill 0.25)
  Top 0.102: v15.65,123.06 15.65,123.7 LED16.2
  Bottom 0.102: v15.65,123.06 15.65,123.19 15.19,123.65 14.44,123.65 14.23,123.86 14.23,124.44 14.56,124.77 15.69,124.77 16.31,125.39 16.31,127.25 16.14,127.42 12.28,127.42 IC1.53
N$LEDB17  (1 unrouted)
N$LEDB18  (1 unrouted)
N$LEDB19  (1 unrouted)
N$LEDB20  (1 unrouted)
N$LEDB21  (1 unrouted)
N$LEDB22  (1 unrouted)
N$LEDB23  (1 unrouted)
N$LEDB24  (1 unrouted)
N$LEDB25  (1 unrouted)
N$LEDB26  (1 unrouted)
N$LEDB27  (1 unrouted)
N$LEDB28  (1 unrouted)
N$LEDB29  (1 unrouted)
N$LEDB30  (1 unrouted)
N$LEDB31  (1 unrouted)
N$LEDB32  (1 unrouted)
N$LEDB33  (1 unrouted)
N$LEDB34  (1 unrouted)
N$LEDB35  (1 unrouted)
N$LEDB36  (1 unrouted)
N$LEDB37  (1 unrouted)
N$LEDB38  (1 unrouted)
N$LEDB39  (1 unrouted)
N$LEDB40  (1 unrouted)
N$LEDB41  (1 unrouted)
N$LEDB42  (1 unrouted)
N$LEDB43  (1 unrouted)
N$LEDB44  (1 unrouted)
N$LEDB45  (1 unrouted)
N$LEDB46  (1 unrouted)
N$LEDB47  (1 unrouted)
N$LEDB48  (1 unrouted)
N$LEDB49  (1 unrouted)
N$LEDB50  (1 unrouted)
N$LEDB51  (1 unrouted)
N$LEDB52  (1 unrouted)
N$LEDB53  (1 unrouted)
N$LEDB54  (1 unrouted)
N$LEDB55  (1 unrouted)
N$LEDB56  (1 unrouted)
N$LEDB57  (1 unrouted)
N$LEDB58  (1 unrouted)
N$LEDB59  (1 unrouted)
N$LEDB60  (1 unrouted)
N$LEDB61  (1 unrouted)
N$LEDB62  (1 unrouted)
N$LEDB63  (1 unrouted)
N$LEDB64  (1 unrouted)
N$LEDB65  (1 unrouted)
N$LEDB66  (1 unrouted)
N$LEDB67  (1 unrouted)
N$LEDB68  (1 unrouted)
N$LEDB69  (1 unrouted)
N$LEDB70  (1 unrouted)
N$LEDB71  (1 unrouted)
N$LEDB72  (1 unrouted)
N$LEDB73  (1 unrouted)
N$LEDB74  (1 unrouted)
N$LEDB75  (1 unrouted)
N$LEDB76  (1 unrouted)
N$LEDB77  (1 unrouted)
N$LEDB78  (1 unrouted)
N$LEDB79  (1 unrouted)
N$LEDB80  (1 unrouted)
N$LEDB81  (1 unrouted)
N$LEDB82  (1 unrouted)
N$LEDB83  (1 unrouted)
N$LEDB84  (1 unrouted)
N$LEDB85  (1 unrouted)
N$LEDB86  (1 unrouted)
N$LEDB87  (1 unrouted)
N$LEDB88  (1 unrouted)
N$LEDB89  (1 unrouted)
N$LEDB90  (1 unrouted)
N$LEDB91  (1 unrouted)
N$LEDB92  (1 unrouted)
N$LEDB93  (1 unrouted)
N$LEDB94  (1 unrouted)
N$LEDB95  (1 unrouted)
N$LEDB96  (1 unrouted)
N$LEDB97  (1 unrouted)
N$LEDB98  (1 unrouted)
N$LEDB99  (1 unrouted)
N$LEDB100  (1 unrouted)
N$LEDB101  (1 unrouted)
N$LEDB102  (1 unrouted)
N$LEDB103  (1 unrouted)
N$LEDB104  (1 unrouted)
N$LEDB105  (1 unrouted)
N$LEDB106  (1 unrouted)
N$LEDB107  (1 unrouted)
N$LEDB108  (1 unrouted)
N$LEDB109  (1 unrouted)
N$LEDB110  (1 unrouted)
N$LEDB111  (1 unrouted)
N$LEDB112  (1 unrouted)
N$LEDB113  (1 unrouted)
N$LEDB114  (1 unrouted)
N$LEDB115  (1 unrouted)
N$LEDB116  (1 unrouted)
N$LEDB117  (1 unrouted)
N$LEDB118  (1 unrouted)
N$LEDB119  (1 unrouted)
N$LEDB120  (1 unrouted)
N$LEDG1  (via drill 0.25)
  Top 0.102: LED1.1 v2.92,138.67 v2.92,138.68
  Bottom 0.102: v2.92,138.68 3.15,138.9 IC1.27
N$LEDG2  (via drill 0.25)
  Top 0.102: LED2.1 7.15,137.73 v7.65,138.23
  Bottom 0.102: v7.65,138.23 6.9,138.98 6.02,138.98 5.7,138.67 5.7,137.68 5.42,137.4 IC1.24
N$LEDG3  (via drill 0.25)
  Top 0.102: LED3.1 11.38,138.3 v10.85,138.83
  Bottom 0.102: IC1.30 10.92,138.9 v10.85,138.83
N$LEDG4  (via drill 0.25)
  Top 0.102: LED4.1 v15.61,137.98
  Bottom 0.102: IC1.33 13.12,137.4 13.44,137.72 13.44,138.19 13.74,138.49 14.29,138.49 14.8,137.98 v15.61,137.98
N$LEDG5  (via drill 0.25)
  Top 0.102: LED5.1 2.65,133.36 2.65,134.9 v2.67,134.92
  Bottom 0.102: v2.67,134.92 2.96,134.92 3.94,135.9 IC1.21
N$LEDG6  (via drill 0.25)
  Top 0.102: LED6.1 6.82,133.43 6.82,135.71 v6.91,135.81
  Bottom 0.102: IC1.18 5.84,134.4 6.02,134.57 6.02,135.21 6.61,135.81 v6.91,135.81
N$LEDG7  (via drill 0.25)
  Top 0.102: LED7.1 11.74,133.46 11.74,134.83 10.95,135.62 v10.95,135.7
  Bottom 0.102: IC1.36 11.35,135.9 11.15,135.7 v10.95,135.7
N$LEDG8  (via drill 0.25)
  Top 0.102: LED8.1 v15.61,133.76
  Bottom 0.102: v15.61,133.76 14.76,133.76 14.13,134.4 IC1.39
N$LEDG9  (via drill 0.25)
  Top 0.102: v2.73,131.49 2.65,131.41 2.65,129.14 LED9.1
  Bottom 0.102: v2.73,131.49 2.73,132.12 3.5,132.9 IC1.15
N$LEDG10  (via drill 0.25)
  Top 0.102: LED10.1 6.84,129.18 6.84,129.75 v6.72,129.87
  Bottom 0.102: v6.72,129.87 6.58,129.87 6.33,130.12 6.33,131.01 5.94,131.4 IC1.12
N$LEDG11  (via drill 0.25)
  Top 0.102: v9.36,129.88 9.49,130.01 10.75,130.01 11.12,129.64 11.12,129.13 LED11.1
  Bottom 0.102: v9.36,129.88 9.49,130.01 10.53,130.01 10.72,130.2 10.72,132.11 11.51,132.9 IC1.42
N$LEDG12  (via drill 0.25)
  Top 0.102: LED12.1 v15.62,129.53
  Bottom 0.102: IC1.45 13.29,131.4 13.72,130.97 14.93,130.97 15.62,130.28 v15.62,129.53
N$LEDG13  (via drill 0.25)
  Top 0.102: LED13.1 3.19,124.91 3.19,125.3 2.57,125.92 2.57,127.08 v2.76,127.27
  Bottom 0.102: IC1.6 3.29,128.4 2.76,127.86 v2.76,127.27
N$LEDG14  (via drill 0.25)
  Top 0.102: LED14.1 7.15,125.13 v7.3,125.28
  Bottom 0.102: v7.3,125.28 7.96,125.94 7.96,127.45 5.51,129.9 IC1.9
N$LEDG15  (via drill 0.25)
  Top 0.102: LED15.1 11.38,124.77 10.78,125.37 v9.96,125.37
  Bottom 0.102: v9.96,125.37 10.49,125.9 10.49,126.54 10.76,126.81 10.76,129.18 11.48,129.9 IC1.48
N$LEDG16  (via drill 0.25)
  Top 0.102: v16.36,128.4 16.43,128.33 16.43,124.86 16.2,124.63 LED16.1
  Bottom 0.102: v16.36,128.4 IC1.51
N$LEDG17  (1 unrouted)
N$LEDG18  (1 unrouted)
N$LEDG19  (1 unrouted)
N$LEDG20  (1 unrouted)
N$LEDG21  (1 unrouted)
N$LEDG22  (1 unrouted)
N$LEDG23  (1 unrouted)
N$LEDG24  (1 unrouted)
N$LEDG25  (1 unrouted)
N$LEDG26  (1 unrouted)
N$LEDG27  (1 unrouted)
N$LEDG28  (1 unrouted)
N$LEDG29  (1 unrouted)
N$LEDG30  (1 unrouted)
N$LEDG31  (1 unrouted)
N$LEDG32  (1 unrouted)
N$LEDG33  (1 unrouted)
N$LEDG34  (1 unrouted)
N$LEDG35  (1 unrouted)
N$LEDG36  (1 unrouted)
N$LEDG37  (1 unrouted)
N$LEDG38  (1 unrouted)
N$LEDG39  (1 unrouted)
N$LEDG40  (1 unrouted)
N$LEDG41  (1 unrouted)
N$LEDG42  (1 unrouted)
N$LEDG43  (1 unrouted)
N$LEDG44  (1 unrouted)
N$LEDG45  (1 unrouted)
N$LEDG46  (1 unrouted)
N$LEDG47  (1 unrouted)
N$LEDG48  (1 unrouted)
N$LEDG49  (1 unrouted)
N$LEDG50  (1 unrouted)
N$LEDG51  (1 unrouted)
N$LEDG52  (1 unrouted)
N$LEDG53  (1 unrouted)
N$LEDG54  (1 unrouted)
N$LEDG55  (1 unrouted)
N$LEDG56  (1 unrouted)
N$LEDG57  (1 unrouted)
N$LEDG58  (1 unrouted)
N$LEDG59  (1 unrouted)
N$LEDG60  (1 unrouted)
N$LEDG61  (1 unrouted)
N$LEDG62  (1 unrouted)
N$LEDG63  (1 unrouted)
N$LEDG64  (1 unrouted)
N$LEDG65  (1 unrouted)
N$LEDG66  (1 unrouted)
N$LEDG67  (1 unrouted)
N$LEDG68  (1 unrouted)
N$LEDG69  (1 unrouted)
N$LEDG70  (1 unrouted)
N$LEDG71  (1 unrouted)
N$LEDG72  (1 unrouted)
N$LEDG73  (1 unrouted)
N$LEDG74  (1 unrouted)
N$LEDG75  (1 unrouted)
N$LEDG76  (1 unrouted)
N$LEDG77  (1 unrouted)
N$LEDG78  (1 unrouted)
N$LEDG79  (1 unrouted)
N$LEDG80  (1 unrouted)
N$LEDG81  (1 unrouted)
N$LEDG82  (1 unrouted)
N$LEDG83  (1 unrouted)
N$LEDG84  (1 unrouted)
N$LEDG85  (1 unrouted)
N$LEDG86  (1 unrouted)
N$LEDG87  (1 unrouted)
N$LEDG88  (1 unrouted)
N$LEDG89  (1 unrouted)
N$LEDG90  (1 unrouted)
N$LEDG91  (1 unrouted)
N$LEDG92  (1 unrouted)
N$LEDG93  (1 unrouted)
N$LEDG94  (1 unrouted)
N$LEDG95  (1 unrouted)
N$LEDG96  (1 unrouted)
N$LEDG97  (1 unrouted)
N$LEDG98  (1 unrouted)
N$LEDG99  (1 unrouted)
N$LEDG100  (1 unrouted)
N$LEDG101  (1 unrouted)
N$LEDG102  (1 unrouted)
N$LEDG103  (1 unrouted)
N$LEDG104  (1 unrouted)
N$LEDG105  (1 unrouted)
N$LEDG106  (1 unrouted)
N$LEDG107  (1 unrouted)
N$LEDG108  (1 unrouted)
N$LEDG109  (1 unrouted)
N$LEDG110  (1 unrouted)
N$LEDG111  (1 unrouted)
N$LEDG112  (1 unrouted)
N$LEDG113  (1 unrouted)
N$LEDG114  (1 unrouted)
N$LEDG115  (1 unrouted)
N$LEDG116  (1 unrouted)
N$LEDG117  (1 unrouted)
N$LEDG118  (1 unrouted)
N$LEDG119  (1 unrouted)
N$LEDG120  (1 unrouted)
N$LEDR1  (via drill 0.25)
  Top 0.102: LED1.4 v1.32,138.05 v1.31,138.06
  Bottom 0.102: IC1.26 3.39,138.4 3.14,138.15 1.41,138.15 v1.31,138.06
N$LEDR2  (via drill 0.25)
  Top 0.102: LED2.4 5.55,137.72 v6.26,138.43
  Bottom 0.102: v6.26,138.43 6.02,138.19 6.02,137.5 5.42,136.9 IC1.23
N$LEDR3  (via drill 0.25)
  Top 0.102: LED3.4 9.78,137.44 v10.41,138.07
  Bottom 0.102: IC1.31 11.27,138.4 10.96,138.09 10.43,138.09 v10.41,138.07
N$LEDR4  (via drill 0.25)
  Top 0.102: LED4.4 v14.02,137.96 v14.01,137.96
  Bottom 0.102: IC1.34 13.21,136.9 14.01,137.7 v14.01,137.96
N$LEDR5  (via drill 0.25)
  Top 0.102: LED5.4 v1.32,133.85
  Bottom 0.102: v1.32,133.85 1.83,134.37 2.9,134.37 3.94,135.4 IC1.20
N$LEDR6  (via drill 0.25)
  Top 0.102: LED6.4 5.55,133.58 v5.79,133.82
  Bottom 0.102: IC1.17 5.71,133.9 v5.79,133.82
N$LEDR7  (via drill 0.25)
  Top 0.102: v10.69,134.46 10.49,134.26 10.49,133.63 9.96,133.1 LED7.4
  Bottom 0.102: IC1.37 11.44,135.4 11.26,135.22 11.26,135.02 v10.7,134.46 v10.69,134.46
N$LEDR8  (via drill 0.25)
  Top 0.102: LED8.4 14.01,133.11 v14.01,133.72
  Bottom 0.102: v14.01,133.72 13.82,133.9 IC1.40
N$LEDR9  (via drill 0.25)
  Top 0.102: LED9.4 v1.32,129.48
  Bottom 0.102: IC1.14 3.57,132.4 3.26,132.09 3.26,130.7 2.04,129.48 v1.32,129.48
N$LEDR10  (via drill 0.25)
  Top 0.102: LED10.4 5.55,130.59 v5.78,130.82
  Bottom 0.102: IC1.11 5.69,130.9 v5.78,130.82
N$LEDR11  (via drill 0.25)
  Top 0.102: LED11.4 9.78,129.26 v10,129.48
  Bottom 0.102: IC1.43 11.45,132.4 11,131.95 11,130.07 10.41,129.48 v10,129.48
N$LEDR12  (via drill 0.25)
  Top 0.102: LED12.4 14.24,129.09 14.24,130.21 v14.45,130.42
  Bottom 0.102: v14.45,130.42 14.17,130.7 13.49,130.7 13.29,130.9 IC1.46
N$LEDR13  (via drill 0.25)
  Top 0.102: LED13.4 1.32,126.43 v1.32,126.44
  Bottom 0.102: IC1.5 4.61,127.84 3.59,127.84 3.29,127.53 3.29,126.98 2.99,126.69 1.57,126.69 v1.32,126.44
N$LEDR14  (via drill 0.25)
  Top 0.102: LED14.4 v5.55,125.27 v5.56,125.28
  Bottom 0.102: IC1.8 5.56,129.4 7.62,127.34 7.62,126.18 7.28,125.84 7.04,125.84 6.21,125.01 5.82,125.01 v5.56,125.28
N$LEDR15  (via drill 0.25)
  Top 0.102: LED15.4 v10.59,124.63
  Bottom 0.102: IC1.49 11.51,129.4 11.02,128.91 11.02,126.7 10.74,126.42 10.74,125.27 10.74,124.78 v10.59,124.63
N$LEDR16  (via drill 0.25)
  Top 0.102: v14.83,124.2 14.8,124.2 14.36,124.63 LED16.4
  Bottom 0.102: IC1.52 16.17,127.9 16.55,127.52 16.55,124.81 15.94,124.2 v14.83,124.2
N$LEDR17  (1 unrouted)
N$LEDR18  (1 unrouted)
N$LEDR19  (1 unrouted)
N$LEDR20  (1 unrouted)
N$LEDR21  (1 unrouted)
N$LEDR22  (1 unrouted)
N$LEDR23  (1 unrouted)
N$LEDR24  (1 unrouted)
N$LEDR25  (1 unrouted)
N$LEDR26  (1 unrouted)
N$LEDR27  (1 unrouted)
N$LEDR28  (1 unrouted)
N$LEDR29  (1 unrouted)
N$LEDR30  (1 unrouted)
N$LEDR31  (1 unrouted)
N$LEDR32  (1 unrouted)
N$LEDR33  (1 unrouted)
N$LEDR34  (1 unrouted)
N$LEDR35  (1 unrouted)
N$LEDR36  (1 unrouted)
N$LEDR37  (1 unrouted)
N$LEDR38  (1 unrouted)
N$LEDR39  (1 unrouted)
N$LEDR40  (1 unrouted)
N$LEDR41  (1 unrouted)
N$LEDR42  (1 unrouted)
N$LEDR43  (1 unrouted)
N$LEDR44  (1 unrouted)
N$LEDR45  (1 unrouted)
N$LEDR46  (1 unrouted)
N$LEDR47  (1 unrouted)
N$LEDR48  (1 unrouted)
N$LEDR49  (1 unrouted)
N$LEDR50  (1 unrouted)
N$LEDR51  (1 unrouted)
N$LEDR52  (1 unrouted)
N$LEDR53  (1 unrouted)
N$LEDR54  (1 unrouted)
N$LEDR55  (1 unrouted)
N$LEDR56  (1 unrouted)
N$LEDR57  (1 unrouted)
N$LEDR58  (1 unrouted)
N$LEDR59  (1 unrouted)
N$LEDR60  (1 unrouted)
N$LEDR61  (1 unrouted)
N$LEDR62  (1 unrouted)
N$LEDR63  (1 unrouted)
N$LEDR64  (1 unrouted)
N$LEDR65  (1 unrouted)
N$LEDR66  (1 unrouted)
N$LEDR67  (1 unrouted)
N$LEDR68  (1 unrouted)
N$LEDR69  (1 unrouted)
N$LEDR70  (1 unrouted)
N$LEDR71  (1 unrouted)
N$LEDR72  (1 unrouted)
N$LEDR73  (1 unrouted)
N$LEDR74  (1 unrouted)
N$LEDR75  (1 unrouted)
N$LEDR76  (1 unrouted)
N$LEDR77  (1 unrouted)
N$LEDR78  (1 unrouted)
N$LEDR79  (1 unrouted)
N$LEDR80  (1 unrouted)
N$LEDR81  (1 unrouted)
N$LEDR82  (1 unrouted)
N$LEDR83  (1 unrouted)
N$LEDR84  (1 unrouted)
N$LEDR85  (1 unrouted)
N$LEDR86  (1 unrouted)
N$LEDR87  (1 unrouted)
N$LEDR88  (1 unrouted)
N$LEDR89  (1 unrouted)
N$LEDR90  (1 unrouted)
N$LEDR91  (1 unrouted)
N$LEDR92  (1 unrouted)
N$LEDR93  (1 unrouted)
N$LEDR94  (1 unrouted)
N$LEDR95  (1 unrouted)
N$LEDR96  (1 unrouted)
N$LEDR97  (1 unrouted)
N$LEDR98  (1 unrouted)
N$LEDR99  (1 unrouted)
N$LEDR100  (1 unrouted)
N$LEDR101  (1 unrouted)
N$LEDR102  (1 unrouted)
N$LEDR103  (1 unrouted)
N$LEDR104  (1 unrouted)
N$LEDR105  (1 unrouted)
N$LEDR106  (1 unrouted)
N$LEDR107  (1 unrouted)
N$LEDR108  (1 unrouted)
N$LEDR109  (1 unrouted)
N$LEDR110  (1 unrouted)
N$LEDR111  (1 unrouted)
N$LEDR112  (1 unrouted)
N$LEDR113  (1 unrouted)
N$LEDR114  (1 unrouted)
N$LEDR115  (1 unrouted)
N$LEDR116  (1 unrouted)
N$LEDR117  (1 unrouted)
N$LEDR118  (1 unrouted)
N$LEDR119  (1 unrouted)
N$LEDR120  (1 unrouted)
SCLK  (via drill 0.25)  (8 unrouted)
  Top 0.102: 2.1,123.45 v2.1,125.45 v2.11,125.46 2.09,125.47 2.09,139.52
  Bottom 0.102: IC1.2 3.93,126.39 3.69,126.15 3.69,125.72 3.42,125.46 v2.11,125.46
SIN_1,2  (1 unrouted)
SIN_3,4  (1 unrouted)
SIN_5,6  (1 unrouted)
SIN_7,8  (1 unrouted)
SOUT2  (1 unrouted)
  Bottom 0.102: IC1.1 4.68,124.53
SOUT4  (1 unrouted)
SOUT6  (1 unrouted)
SOUT8  (1 unrouted)